# EAGLE board CPC_SIXROM_v1.00 (EAGLE 6.4)
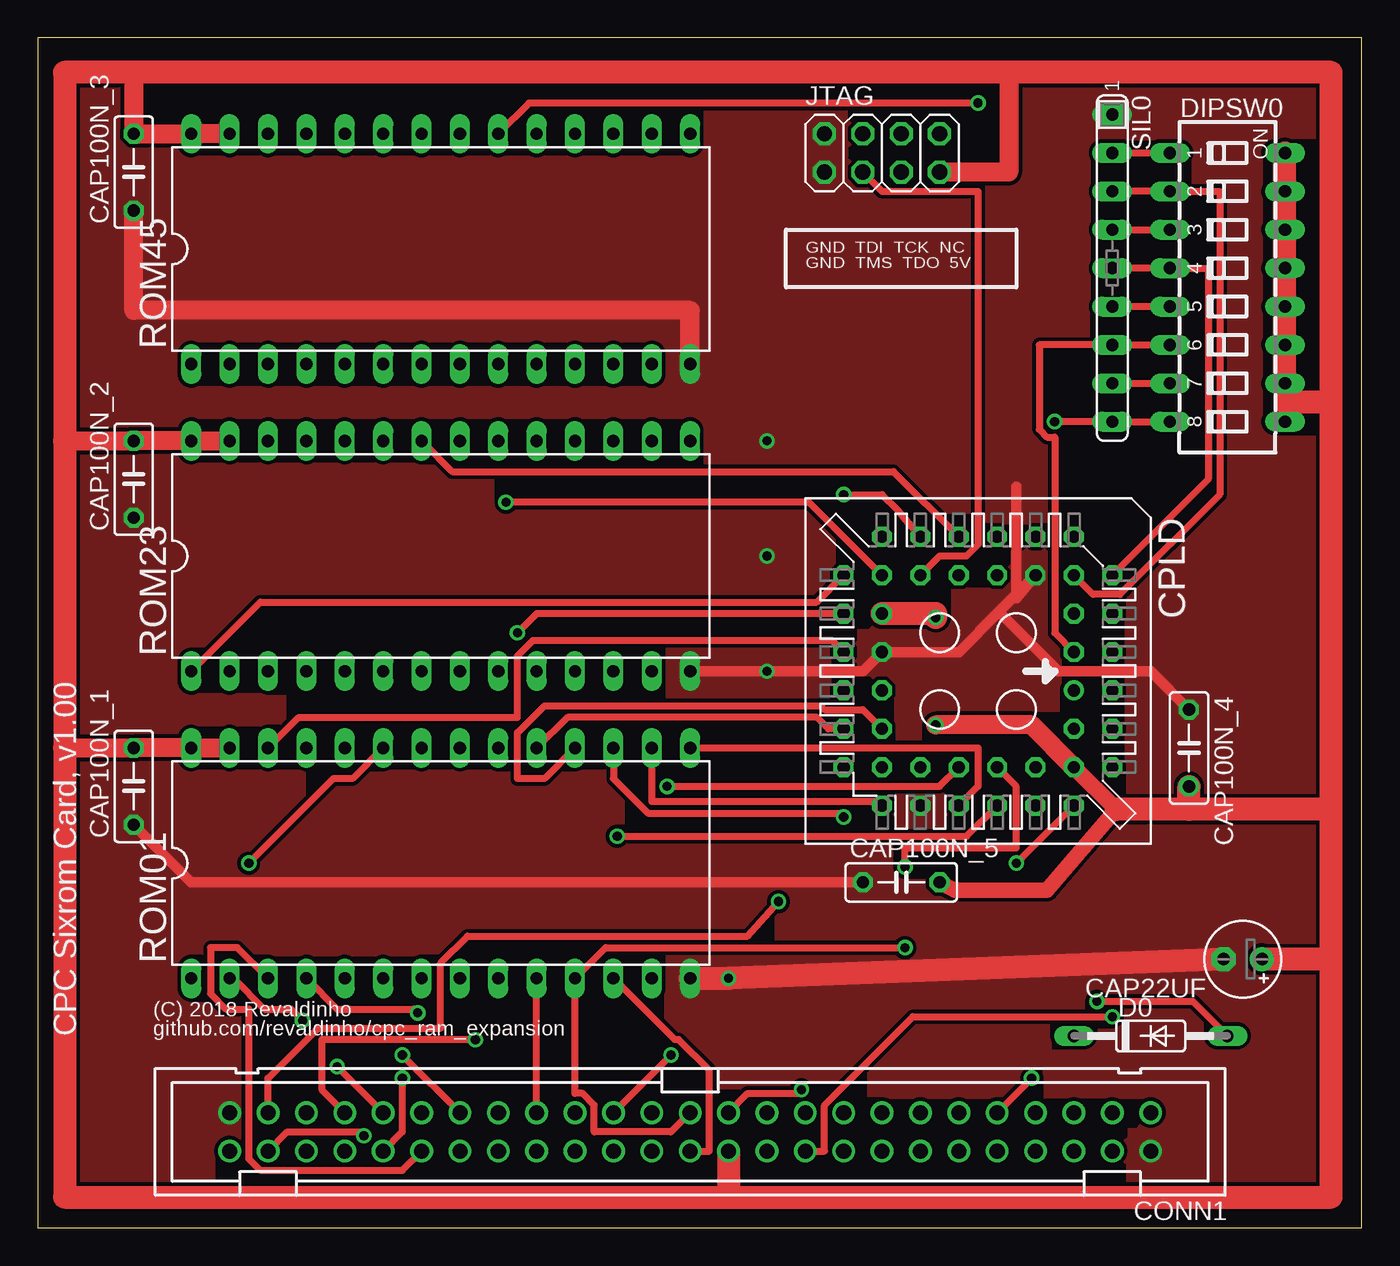
[diagram p0: board, top side]
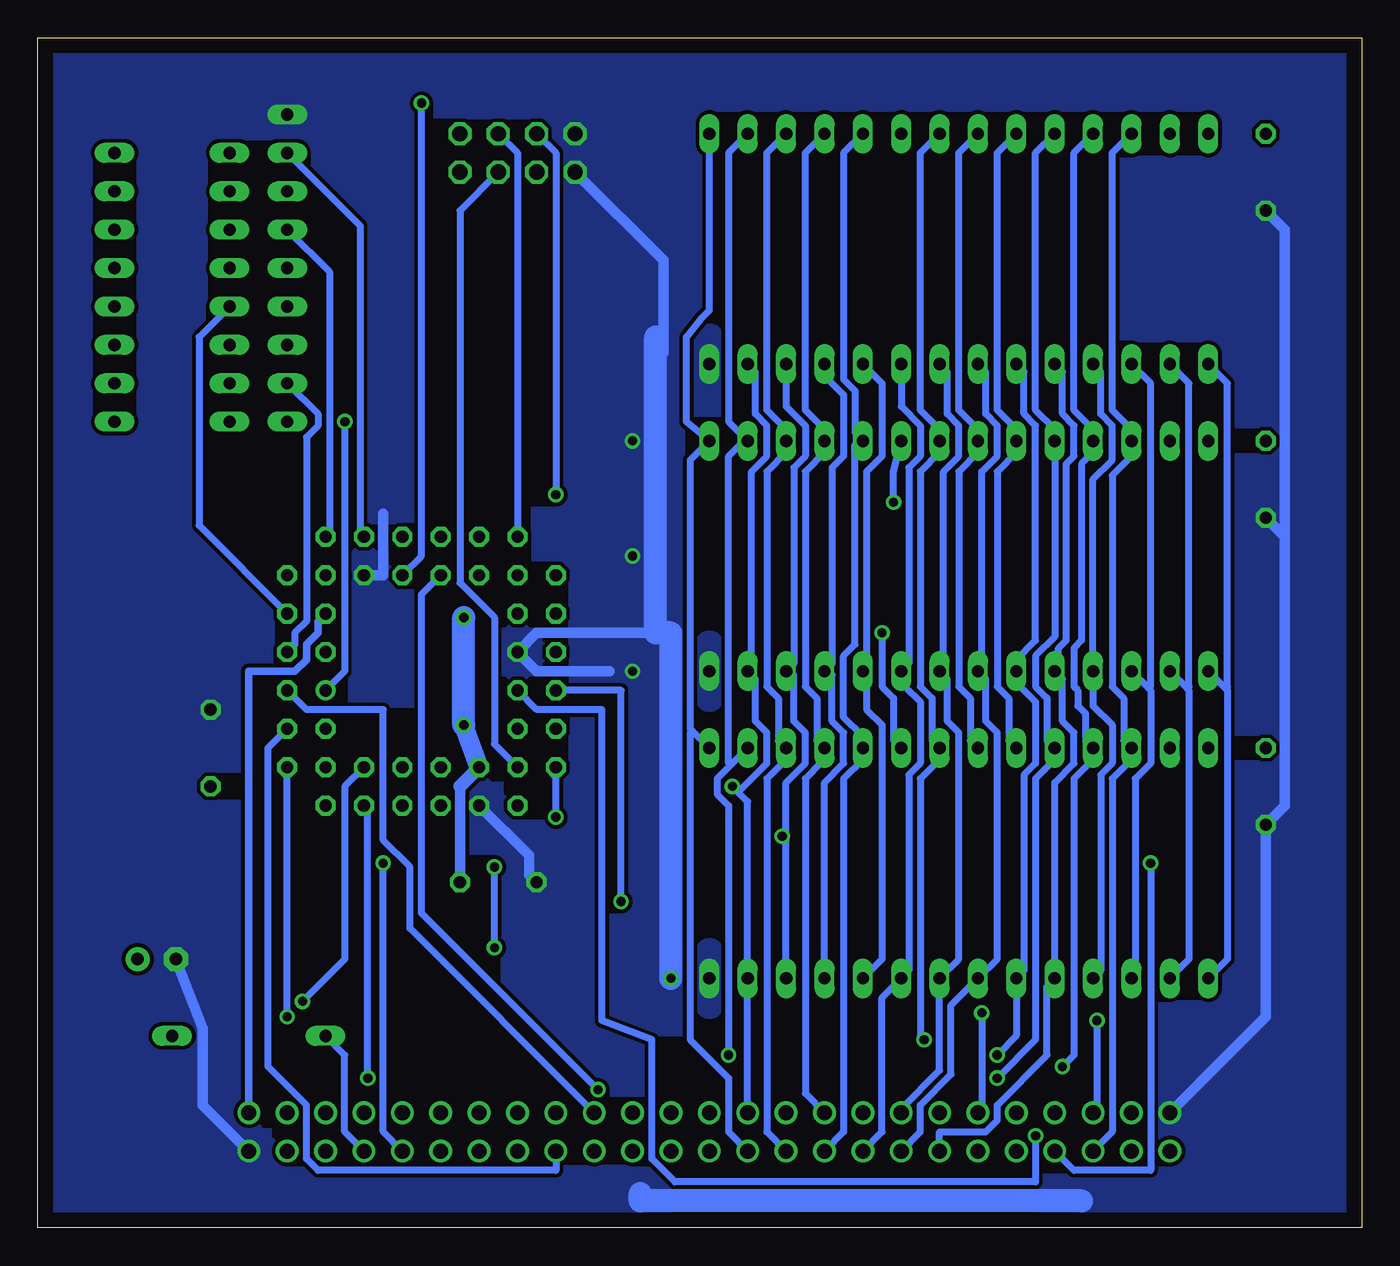
[diagram p1: board, bottom side, seen from below]

Size 87.63 x 78.74 mm. Coordinates in mm from the lower left corner, seen from the top.
Outline: 0,0 87.63,0 87.63,78.74 0,78.74 0,0
Copper layers (1*16): Top 0.035mm / dielectric 1.5mm / Bottom 0.035mm
Design rules "default": minimum track width 10mil, minimum drill 24mil, track to track 8mil, track to pad 8mil, pad to pad 8mil, via to via 8mil, smd to smd 8mil, copper to edge 40mil, drill to drill 8mil, minimum pad ring 10mil, minimum via ring 8mil, stop-mask expansion 4mil, vias tented up to drill 0mil, thermal gap 10mil
Net classes: 0 signal: width 0.457 mm, clearance 0.254 mm; 1 supply: width 0.711 mm, clearance 0.254 mm

## Footprints (pad centres in the part's own frame; a part is rotated, then mirrored left to right if it is on the bottom)
E2,5-5 = drill 0.813 pad 1.6: + -1.27,0 | drill 0.813 pad 1.6 octagon: - 1.27,0
C050-025X075 = drill 0.813 octagon: 1 -2.54,0; 2 2.54,0
PAK100/2500-50 = drill 1 pad 1.422: 1 -30.48,-1.27; 2 -30.48,1.27; 3 -27.94,-1.27; 4 -27.94,1.27; 5 -25.4,-1.27; 6 -25.4,1.27; 7 -22.86,-1.27; 8 -22.86,1.27; 9 -20.32,-1.27; 10 -20.32,1.27; 11 -17.78,-1.27; 12 -17.78,1.27; 13 -15.24,-1.27; 14 -15.24,1.27; 15 -12.7,-1.27; 16 -12.7,1.27; 17 -10.16,-1.27; 18 -10.16,1.27; 19 -7.62,-1.27; 20 -7.62,1.27; 21 -5.08,-1.27; 22 -5.08,1.27; 23 -2.54,-1.27; 24 -2.54,1.27; 25 0,-1.27; 26 0,1.27; 27 2.54,-1.27; 28 2.54,1.27; 29 5.08,-1.27; 30 5.08,1.27; 31 7.62,-1.27; 32 7.62,1.27; 33 10.16,-1.27; 34 10.16,1.27; 35 12.7,-1.27; 36 12.7,1.27; 37 15.24,-1.27; 38 15.24,1.27; 39 17.78,-1.27; 40 17.78,1.27; 41 20.32,-1.27; 42 20.32,1.27; 43 22.86,-1.27; 44 22.86,1.27; 45 25.4,-1.27; 46 25.4,1.27; 47 27.94,-1.27; 48 27.94,1.27; 49 30.48,-1.27; 50 30.48,1.27
PLCC-S44-SOCKET = drill 0.813: 1 1.27,6.35 | drill 0.813 octagon: 2 -1.27,8.89; 3 -1.27,6.35; 4 -3.81,8.89; 5 -3.81,6.35; 6 -6.35,8.89; 7 -8.89,6.35; 8 -6.35,6.35; 9 -8.89,3.81; 10 -6.35,3.81; 11 -8.89,1.27; 12 -6.35,1.27; 13 -8.89,-1.27; 14 -6.35,-1.27; 15 -8.89,-3.81; 16 -6.35,-3.81; 17 -8.89,-6.35; 18 -6.35,-8.89; 19 -6.35,-6.35; 20 -3.81,-8.89; 21 -3.81,-6.35; 22 -1.27,-8.89; 23 -1.27,-6.35; 24 1.27,-8.89; 25 1.27,-6.35; 26 3.81,-8.89; 27 3.81,-6.35; 28 6.35,-8.89; 29 8.89,-6.35; 30 6.35,-6.35; 31 8.89,-3.81; 32 6.35,-3.81; 33 8.89,-1.27; 34 6.35,-1.27; 35 8.89,1.27; 36 6.35,1.27; 37 8.89,3.81; 38 6.35,3.81; 39 8.89,6.35; 40 6.35,8.89; 41 6.35,6.35; 42 3.81,8.89; 43 3.81,6.35; 44 1.27,8.89
DO35-10 = drill 0.813 long: A 5.08,0; C -5.08,0
SD4-08 = drill 0.813 long: 1 -8.89,-3.81; 2 -6.35,-3.81; 3 -3.81,-3.81; 4 -1.27,-3.81; 5 1.27,-3.81; 6 3.81,-3.81; 7 6.35,-3.81; 8 8.89,-3.81; 9 8.89,3.81; 10 6.35,3.81; 11 3.81,3.81; 12 1.27,3.81; 13 -1.27,3.81; 14 -3.81,3.81; 15 -6.35,3.81; 16 -8.89,3.81
2X04 = drill 1.016 octagon: 1 -3.81,-1.27; 2 -3.81,1.27; 3 -1.27,-1.27; 4 -1.27,1.27; 5 1.27,-1.27; 6 1.27,1.27; 7 3.81,-1.27; 8 3.81,1.27
DIL28 = drill 0.813 long: 1 -16.51,-7.62; 2 -13.97,-7.62; 3 -11.43,-7.62; 4 -8.89,-7.62; 5 -6.35,-7.62; 6 -3.81,-7.62; 7 -1.27,-7.62; 8 1.27,-7.62; 9 3.81,-7.62; 10 6.35,-7.62; 11 8.89,-7.62; 12 11.43,-7.62; 13 13.97,-7.62; 14 16.51,-7.62; 15 16.51,7.62; 16 13.97,7.62; 17 11.43,7.62; 18 8.89,7.62; 19 6.35,7.62; 20 3.81,7.62; 21 1.27,7.62; 22 -1.27,7.62; 23 -3.81,7.62; 24 -6.35,7.62; 25 -8.89,7.62; 26 -11.43,7.62; 27 -13.97,7.62; 28 -16.51,7.62
SIL9 = drill 0.813 long: 1 -10.16,0; 2 -7.62,0; 3 -5.08,0; 4 -2.54,0; 5 0,0; 6 2.54,0; 7 5.08,0; 8 7.62,0; 9 10.16,0

## Placement (x,y rotation side)
CAP22UF  [E2,5-5]  79.76,17.78 180 top
CAP100N_1  [C050-025X075]  6.35,29.21 90 top
CAP100N_2  [C050-025X075]  6.35,49.53 90 top
CAP100N_3  [C050-025X075]  6.35,69.85 90 top
CAP100N_4  [C050-025X075]  76.2,31.75 270 top
CAP100N_5  [C050-025X075]  57.15,22.86 0 top
CONN1  [PAK100/2500-50]  43.18,6.35 180 top
CPLD  [PLCC-S44-SOCKET]  62.23,36.83 270 top
D0  [DO35-10]  73.66,12.7 0 top
DIPSW0  [SD4-08]  78.74,62.23 270 top
JTAG  [2X04]  55.88,71.12 0 top
ROM01  [DIL28]  26.67,24.13 0 top
ROM23  [DIL28]  26.67,44.45 0 top
ROM45  [DIL28]  26.67,64.77 0 top
SIL0  [SIL9]  71.12,63.5 270 top

## Library data of the parts
CAP22UF CAP100N_1-CAP100N_5 = resistor
CONN1 = con-3m
CPLD ROM01 ROM23 ROM45 = ic-package
D0 = diode
DIPSW0 = switch-dil
JTAG = pinhead
SIL0 = resistor-sil

## Nets
A0: CONN1.33 ROM01.10 ROM23.10 ROM45.10
A1: CONN1.34 ROM01.9 ROM23.9 ROM45.9
A2: CONN1.35 ROM01.8 ROM23.8 ROM45.8
A3: CONN1.36 ROM01.7 ROM23.7 ROM45.7
A4: CONN1.37 ROM01.6 ROM23.6 ROM45.6
A5: CONN1.38 ROM01.5 ROM23.5 ROM45.5
A6: CONN1.39 ROM01.4 ROM23.4 ROM45.4
A7: CONN1.40 ROM01.3 ROM23.3 ROM45.3
A8: CONN1.41 ROM01.25 ROM23.25 ROM45.25
A9: CONN1.42 ROM01.24 ROM23.24 ROM45.24
A10: CONN1.43 ROM01.21 ROM23.21 ROM45.21
A11: CONN1.44 ROM01.23 ROM23.23 ROM45.23
A12: CONN1.45 ROM01.2 ROM23.2 ROM45.2
A13: CONN1.46 CPLD.22 ROM01.26 ROM23.26 ROM45.26
A14: CONN1.47 CPLD.24
A15: CONN1.48 CPLD.25
BUSACK_B: CONN1.13
BUSRESET_B: CONN1.11
BUSRQ_B: CONN1.14
CLK: CONN1.1 CPLD.5
CURSOR: CONN1.5
D0: CONN1.25 CPLD.36 ROM01.11 ROM23.11 ROM45.11
D1: CONN1.26 CPLD.35 ROM01.12 ROM23.12 ROM45.12
D2: CONN1.27 CPLD.34 ROM01.13 ROM23.13 ROM45.13
D3: CONN1.28 CPLD.33 ROM01.15 ROM23.15 ROM45.15
D4: CONN1.29 CPLD.29 ROM01.16 ROM23.16 ROM45.16
D5: CONN1.30 CPLD.28 ROM01.17 ROM23.17 ROM45.17
D6: CONN1.31 CPLD.27 ROM01.18 ROM23.18 ROM45.18
D7: CONN1.32 CPLD.26 ROM01.19 ROM23.19 ROM45.19
DIP0: CPLD.9 DIPSW0.1 SIL0.2
DIP1: CPLD.8 DIPSW0.2 SIL0.3
DIP2: CPLD.7 DIPSW0.3 SIL0.4
DIP3: CPLD.6 DIPSW0.4 SIL0.5
DIP4: CPLD.4 DIPSW0.5 SIL0.6
DIP5: CPLD.3 DIPSW0.6 SIL0.7
DIP6: CPLD.2 DIPSW0.7 SIL0.8
DIP7: CPLD.1 DIPSW0.8 SIL0.9
EXP_B: CONN1.3
HALT_B: CONN1.17
INT_B: CONN1.16
IOREQ_B: CONN1.20 CPLD.40
LPEN: CONN1.4
M1_B: CONN1.22
MREQ_B: CONN1.23 CPLD.14
NMI_B: CONN1.15
RAMDIS: CONN1.6
RAMRD_B: CONN1.7
RD_B: CONN1.19 CPLD.44
READY: CONN1.12
RESET_B: CONN1.10 CPLD.39
RFSH_B: CONN1.21
ROM01CS_B: CPLD.20 ROM01.20
ROM23CS_B: CPLD.19 ROM23.20
ROM45CS_B: CPLD.12 ROM45.20
ROMA14: CPLD.18 ROM01.1 ROM23.1 ROM45.1
ROMDIS: CONN1.8 D0.C
ROMDIS_PRE: CPLD.38 D0.A
ROMEN_B: CONN1.9 CPLD.37
ROMOE_B: CPLD.13 ROM01.22 ROM23.22 ROM45.22
SOUND: CONN1.50
TCK: CPLD.17 JTAG.6
TDI: CPLD.15 JTAG.4
TDO: CPLD.30 JTAG.5
TMS: CPLD.16 JTAG.3
VDD [supply]: CAP22UF.+ CAP100N_1.2 CAP100N_2.2 CAP100N_3.2 CAP100N_4.2 CAP100N_5.2 CONN1.24 CPLD.21 CPLD.32 CPLD.41 DIPSW0.9 DIPSW0.10 DIPSW0.11 DIPSW0.12 DIPSW0.13 DIPSW0.14 DIPSW0.15 DIPSW0.16 JTAG.7 ROM01.27 ROM01.28 ROM23.27 ROM23.28 ROM45.27 ROM45.28
VSS [supply]: CAP22UF.- CAP100N_1.1 CAP100N_2.1 CAP100N_3.1 CAP100N_4.1 CAP100N_5.1 CONN1.2 CONN1.49 CPLD.10 CPLD.23 CPLD.31 JTAG.1 JTAG.2 ROM01.14 ROM23.14 ROM45.14 SIL0.1
WR_B: CONN1.18 CPLD.42

## Tracks (layer width: path | path; a pad name or v marks a point on that pad's centre or on a via)
A0
  Top 0.457: CONN1.33 ROM01.10
  Bottom 0.457: ROM45.10 31.75,55.88 31.75,51.05 32.77,50.04 32.77,37.08 ROM23.10 32.77,36.83 32.77,34.29 31.75,33.27 31.75,17.78 ROM01.10
A1
  Bottom 0.457: CONN1.34 31.75,6.35 31.75,15.24 ROM01.9 29.97,17.02 29.97,29.97 29.21,30.73 29.21,34.8 30.23,35.81 30.23,36.83 ROM23.9 29.97,37.34 29.97,50.29 29.21,51.05 29.21,53.09 30.48,54.36 ROM45.9
A2
  Bottom 0.457: CONN1.35 30.48,7.87 27.94,10.41 ROM01.8 26.67,17.78 26.67,32.77 27.43,33.53 27.43,36.32 ROM23.8 27.69,36.83 27.69,50.04 26.67,51.05 26.67,53.09 27.43,53.85 27.43,56.64 ROM45.8
A3
  Bottom 0.457: CONN1.36 29.21,6.35 29.21,8.13 27.18,10.16 27.18,14.73 ROM01.7 24.13,17.78 24.13,32.77 24.89,33.53 24.89,36.32 ROM23.7 25.15,36.83 25.15,50.04 24.13,51.05 24.13,53.09 24.89,53.85 24.89,56.64 ROM45.7
A4  (via drill 0.61)
  Top 0.457: v24.13,11.43 CONN1.37
  Bottom 0.457: ROM45.6 22.35,56.64 22.35,53.85 21.59,53.09 21.59,38.86 22.86,37.59 ROM23.6 22.86,36.07 21.59,34.8 21.59,30.73 22.35,29.97 22.35,17.02 ROM01.6 22.86,12.7 v24.13,11.43
A5
  Bottom 0.457: CONN1.38 27.94,6.35 24.89,6.35 24.13,7.11 24.13,8.13 20.83,11.43 20.83,16 ROM01.5 20.32,29.46 19.05,30.73 19.05,32.77 19.81,33.53 19.81,36.32 ROM23.5 20.07,36.83 20.07,38.35 19.56,38.86 19.56,50.55 19.05,51.05 19.05,53.09 19.81,53.85 19.81,56.64 ROM45.5
A6  (via drill 0.61)
  Top 0.457: v25.15,14.22 24.89,14.48 19.81,14.48 ROM01.4
  Bottom 0.457: ROM01.4 17.27,17.02 17.27,29.97 16.51,30.73 16.51,33.27 17.78,34.54 ROM23.4 17.78,49.53 16.51,50.8 16.51,53.09 17.27,53.85 17.27,56.64 ROM45.4 | CONN1.39 25.15,7.87 v25.15,14.22
A7
  Top 0.457: CONN1.40 24.13,3.81 14.73,3.81 13.97,4.57 13.97,14.48 12.45,14.48 11.43,15.49 11.43,18.54 13.21,18.54 ROM01.3
  Bottom 0.457: ROM01.3 14.99,16.76 14.99,29.72 13.97,30.73 13.97,35.56 14.1,35.69 | ROM23.3 14.1,35.69 | ROM45.3 13.97,55.88 13.97,35.81 14.1,35.69
A8  (via drill 0.61)
  Top 0.457: v19.81,10.67 CONN1.41
  Bottom 0.457: ROM45.25 19.05,71.12 19.05,54.1 17.78,52.83 ROM23.25 17.78,51.31 18.54,50.55 18.54,38.86 19.05,38.35 19.05,35.81 18.8,35.56 18.8,34.54 18.29,34.04 18.29,32.26 ROM01.25 18.03,31.75 18.03,30.73 19.05,29.72 19.05,11.43 v19.81,10.67
A9  (via drill 0.61)
  Top 0.457: CONN1.42 24.13,6.35 v24.13,9.91
  Bottom 0.457: ROM45.24 21.59,71.12 21.59,54.1 20.32,52.83 ROM23.24 20.32,39.12 21.59,37.85 21.59,35.81 20.83,35.05 20.83,32.26 ROM01.24 20.57,31.75 20.57,30.73 21.59,29.72 21.59,12.45 v24.13,9.91
A10  (via drill 0.61)
  Top 0.457: CONN1.43 18.8,9.14 18.8,12.45 v28.96,12.45
  Bottom 0.457: ROM45.21 29.21,71.12 29.21,54.1 27.94,52.83 ROM23.21 27.94,51.31 29.21,50.04 29.21,35.81 28.45,35.05 28.45,32.26 ROM01.21 28.19,31.75 28.19,30.73 29.21,29.72 29.21,12.7 v28.96,12.45
A11  (via drill 0.61)
  Top 0.457: v13.97,24.13 19.56,29.72 20.83,29.72 ROM01.23
  Bottom 0.457: ROM01.23 23.37,32.26 23.37,35.05 24.13,35.81 24.13,50.04 22.86,51.31 ROM23.23 22.86,52.83 24.13,54.1 24.13,71.12 ROM45.23 | CONN1.44 19.05,3.81 13.97,3.81 v13.97,24.13
A12  (via drill 0.61)
  Top 0.457: v17.53,13.72 16.76,14.48 14.99,14.48 12.95,16.51 ROM01.2
  Bottom 0.457: ROM01.2 11.43,17.78 11.43,35.56 11.56,35.69 | ROM23.2 11.56,35.69 | ROM45.2 11.43,55.88 11.43,35.81 11.56,35.69 | CONN1.45 17.53,7.87 v17.53,13.72
A13
  Top 0.457: CPLD.22 52.58,38.86 32.77,38.86 31.75,37.85 31.75,33.78 17.27,33.78 ROM01.26
  Bottom 0.457: ROM45.26 16.51,71.12 16.51,54.1 15.24,52.83 ROM23.26 15.24,51.05 16.51,49.78 16.51,35.81 15.75,35.05 15.75,32.26 ROM01.26 15.49,31.75 15.49,30.73 16.51,29.72 16.51,6.35 CONN1.46
A14  (via drill 0.61)
  Top 0.457: v49.02,21.59 46.99,19.3 28.45,19.3 26.67,17.53 26.67,13.21 18.54,13.21 15.24,9.91 CONN1.47
  Bottom 0.457: CPLD.24 49.02,35.56 v49.02,21.59
A15  (via drill 0.61)
  Top 0.457: v21.59,6.1 21.34,6.35 16.51,6.35 CONN1.48
  Bottom 0.457: CPLD.25 54.61,34.29 50.29,34.29 50.29,13.72 46.99,12.45 46.99,4.57 45.47,3.05 21.59,3.05 v21.59,6.1
CLK
  Bottom 0.508: CPLD.5 69.09,40.13 69.09,39.37 69.85,38.61 69.85,37.59 70.61,36.83 73.66,36.83 CONN1.1
D0  (via drill 0.61)
  Top 0.457: CONN1.25 41.91,6.35 36.83,6.35 36.83,8.13 36.07,8.89 35.56,8.89 ROM01.11 37.59,18.54 v57.4,18.54 | CPLD.36 64.77,29.21 64.77,25.15 57.4,25.15 v57.4,23.88
  Bottom 0.457: ROM45.11 35.56,56.39 34.29,55.12 34.29,51.05 35.05,50.29 35.05,37.34 ROM23.11 35.31,36.83 35.05,36.58 35.05,33.53 34.29,32.77 34.29,30.73 35.56,29.46 ROM01.11 | v57.4,18.54 v57.4,23.88
D1  (via drill 0.61)
  Top 0.457: ROM01.12 42.16,12.45 42.42,12.45 44.45,10.41 44.45,5.08 CONN1.26 | CPLD.35 61.47,25.91 v38.35,25.91
  Bottom 0.457: ROM45.12 38.1,54.36 36.83,53.09 36.83,51.05 37.59,50.29 37.59,37.34 ROM23.12 37.85,36.83 37.59,36.58 37.59,33.53 36.83,32.77 36.83,30.73 38.1,29.46 38.1,25.91 v38.35,25.91 38.1,25.65 ROM01.12
D2  (via drill 0.61)
  Top 0.457: CPLD.34 59.69,29.21 v41.66,29.21
  Bottom 0.457: CONN1.27 ROM01.13 40.64,28.19 41.27,28.83 | 41.27,28.83 v41.66,29.21 | 41.27,28.83 39.37,30.73 39.37,32.77 40.13,33.53 40.13,36.32 ROM23.13 40.39,36.83 40.39,50.04 39.37,51.05 39.37,53.09 40.13,53.85 40.13,56.64 ROM45.13
D3
  Top 0.457: CPLD.33 62.23,29.21 62.23,31.75 ROM01.15
  Bottom 0.457: 44.32,32.89 44.45,33.02 44.45,50.8 ROM23.15 44.7,53.34 44.7,58.93 43.69,60.2 43.18,60.71 ROM45.15 | 44.32,32.89 ROM01.15 | CONN1.28 41.91,6.35 41.91,9.91 44.45,12.45 44.45,32.77 44.32,32.89
D4  (via drill 0.61)
  Top 0.457: ROM01.16 40.64,28.19 55.63,28.19 CPLD.29 | v41.91,11.43 CONN1.29
  Bottom 0.457: ROM45.16 41.91,71.12 41.91,53.34 ROM23.16 40.89,52.07 41.91,51.05 41.91,30.73 41.78,30.61 | v41.91,11.43 41.91,27.94 42.67,28.7 42.67,29.72 41.78,30.61 | ROM01.16 41.78,30.61
D5  (via drill 0.61)
  Top 0.457: v53.34,27.18 53.34,27.43 40.39,27.43 38.1,29.72 ROM01.17
  Bottom 0.457: ROM45.17 39.37,71.12 39.37,54.1 38.1,52.83 ROM23.17 38.1,51.31 39.37,50.04 39.37,35.81 38.61,35.05 38.61,32.26 ROM01.17 38.35,31.75 38.35,30.73 39.37,29.72 39.37,6.35 CONN1.30 | v53.34,27.18 CPLD.28
D6
  Top 0.457: CPLD.27 54.61,34.29 52.07,34.29 51.82,34.54 33.53,34.54 31.75,32.77 31.75,29.72 33.53,29.72 ROM01.18
  Bottom 0.457: ROM45.18 36.83,71.12 36.83,54.1 35.56,52.83 ROM23.18 35.56,51.31 36.83,50.04 36.83,35.81 36.07,35.05 36.07,32.26 ROM01.18 35.81,31.75 35.81,30.73 36.83,29.72 36.83,8.89 CONN1.31
D7
  Top 0.457: ROM01.19 35.05,33.78 51.56,33.78 52.32,33.02 CPLD.26
  Bottom 0.457: ROM45.19 34.29,71.12 34.29,56.13 33.53,55.37 33.53,52.58 ROM23.19 33.27,52.07 33.53,51.82 33.53,38.61 34.29,37.85 34.29,33.78 33.02,32.51 ROM01.19 33.02,30.99 34.29,29.72 34.29,6.35 CONN1.32
DIP0
  Top 0.457: SIL0.2 DIPSW0.1
  Bottom 0.457: CPLD.9 66.29,45.97 66.29,66.29 SIL0.2
DIP1
  Top 0.457: CPLD.8 69.85,41.91 71.63,41.91 78.23,48.51 78.23,68.58 DIPSW0.2 SIL0.3
DIP2
  Top 0.457: SIL0.4 DIPSW0.3
  Bottom 0.457: CPLD.7 68.33,45.97 68.33,63.25 SIL0.4
DIP3
  Top 0.457: CPLD.6 77.47,49.53 77.47,63.5 DIPSW0.4 SIL0.5
DIP4
  Top 0.457: DIPSW0.5 SIL0.6
  Bottom 0.457: CPLD.4 76.96,46.48 76.96,58.93 DIPSW0.5
DIP5
  Top 0.457: CPLD.3 67.31,39.37 67.31,52.32 66.8,52.32 66.29,52.83 66.29,58.42 SIL0.7 DIPSW0.6
DIP6
  Top 0.457: SIL0.8 DIPSW0.7
  Bottom 0.457: CPLD.2 70.61,38.61 70.61,39.37 69.85,40.13 69.85,52.32 69.09,53.09 69.09,53.85 SIL0.8
DIP7  (via drill 0.61)
  Top 0.457: v67.31,53.34 SIL0.9 DIPSW0.8
  Bottom 0.457: CPLD.1 67.31,36.83 v67.31,53.34
IOREQ_B  (via drill 0.61)
  Top 0.457: v71.12,13.97 57.91,13.97 52.07,8.13 52.07,5.08 CONN1.20
  Bottom 0.457: v71.12,13.97 CPLD.40
MREQ_B  (via drill 0.61)
  Top 0.457: v50.55,9.14 50.29,8.89 46.99,8.89 CONN1.23
  Bottom 0.457: CPLD.14 62.23,41.91 62.23,20.83 v50.55,9.14
RD_B
  Bottom 0.457: CPLD.44 69.85,34.29 64.77,34.29 64.77,25.65 62.99,23.88 62.99,19.81 CONN1.19
RESET_B  (via drill 0.61)
  Top 0.457: v64.77,24.13 CPLD.39
  Bottom 0.457: v64.77,24.13 64.77,6.35 CONN1.10
ROM01CS_B  (via drill 0.61)
  Top 0.457: v31.75,39.37 33.02,40.64 CPLD.20
  Bottom 0.457: ROM01.20 30.99,32.26 30.99,35.05 31.75,35.81 v31.75,39.37
ROM23CS_B  (via drill 0.61)
  Top 0.457: v30.99,48.01 51.05,48.01 CPLD.19
  Bottom 0.457: ROM23.20 30.99,50.04 v30.99,48.01
ROM45CS_B  (via drill 0.61)
  Top 0.457: ROM45.20 32.51,74.42 v62.23,74.42
  Bottom 0.457: v62.23,74.42 62.23,44.45 CPLD.12
ROMA14
  Top 0.457: CPLD.18 51.56,41.4 14.73,41.4 ROM23.1
  Bottom 0.457: ROM01.1 8.89,17.78 8.89,35.56 9.02,35.69 | ROM23.1 9.02,35.69 | ROM45.1 8.89,55.88 8.89,35.81 9.02,35.69
ROMDIS
  Bottom 0.457: D0.C 67.31,11.43 67.31,6.35 CONN1.8
ROMDIS_PRE  (via drill 0.61)
  Top 0.457: D0.A 76.45,14.99 v70.1,14.99
  Bottom 0.457: v70.1,14.99 67.31,17.78 67.31,29.21 CPLD.38
ROMEN_B  (via drill 0.61)
  Top 0.457: CONN1.9 v65.79,9.91
  Bottom 0.457: CPLD.37 65.79,27.69 v65.79,9.91
ROMOE_B
  Top 0.457: CPLD.13 56.64,50.04 27.43,50.04 ROM23.22
  Bottom 0.457: ROM01.22 25.91,32.26 25.91,35.05 26.67,35.81 26.67,50.04 25.4,51.31 ROM23.22 25.4,52.83 26.67,54.1 26.67,71.12 ROM45.22
TCK
  Bottom 0.457: CPLD.17 55.88,71.12 JTAG.6
TDI  (via drill 0.61)
  Top 0.457: v53.34,48.51 55.88,48.51 56.9,47.5 CPLD.15
  Bottom 0.457: v53.34,48.51 53.34,71.12 JTAG.4
TDO
  Bottom 0.457: CPLD.30 57.4,32 57.4,40.39 59.69,42.67 59.69,67.31 JTAG.5
TMS
  Top 0.457: CPLD.16 59.69,44.45 61.47,44.45 62.23,45.21 62.23,68.58 55.88,68.58 JTAG.3
VDD  (via drill 0.61)
  Top 0.711: 82.55,54.61 DIPSW0.9
  Top 1.016: CPLD.41 71.37,27.69 66.8,22.35 60.71,22.35 CAP100N_5.2
  Top 1.27: ROM23.27 ROM23.28 CAP100N_2.2 1.78,52.07 | ROM01.27 ROM01.28 CAP100N_1.2 1.78,31.75 | ROM45.27 ROM45.28 CAP100N_3.2 6.35,76.45 | JTAG.7 64.26,69.85 64.26,76.45 | CPLD.41 65.79,33.27 v59.44,33.27
  Top 1.524: CONN1.24 45.72,2.03 | 45.72,2.03 85.6,2.03 85.6,17.78 | 85.6,17.78 85.6,27.69 | 85.6,27.69 85.6,54.61 | 85.6,54.61 85.6,76.45 64.26,76.45 6.35,76.45 1.78,76.45 1.78,52.07 1.78,31.75 1.78,2.03 45.72,2.03 | CPLD.21 59.44,40.64 v59.44,40.39 | DIPSW0.16 DIPSW0.15 DIPSW0.14 DIPSW0.13 DIPSW0.12 DIPSW0.11 DIPSW0.10 82.55,54.61 85.6,54.61 | 85.6,27.69 76.2,27.69 | 76.2,27.69 CAP100N_4.2 | 76.2,27.69 71.37,27.69 | 85.6,17.78 CAP22UF.+
  Bottom 0.711: 59.69,29.21 CAP100N_5.2
  Bottom 0.889: CPLD.32 59.69,29.21
  Bottom 1.27: CPLD.32 v59.44,33.27
  Bottom 1.524: v59.44,33.27 v59.44,40.39
VSS  (via drill 0.61)
  Top 0.711: ROM23.14 v48.26,36.83 54.61,36.83 CPLD.23 60.96,38.1 63.63,40.77 | 63.63,40.77 CPLD.10 64.77,41.66 64.77,49.02 | CAP100N_4.1 73.66,36.83 67.56,36.83 63.63,40.77 | CAP100N_1.1 10.16,22.86 CAP100N_5.1
  Top 1.27: ROM45.14 43.18,60.71 6.35,60.71 CAP100N_3.1
  Top 1.524: CAP22UF.- v45.72,16.51 ROM01.14
  Bottom 0.711: 5.08,45.72 5.08,27.94 CAP100N_1.1 6.35,13.97 CONN1.49 | CAP100N_2.1 5.08,45.72 | CAP100N_3.1 5.08,66.04 5.08,45.72 | CPLD.31 55.12,24.64 55.12,23.37 CAP100N_5.1 | CONN1.2 76.71,8.13 76.71,13.21 CAP22UF.- | JTAG.1 46.23,64.01 46.23,57.91 46.74,58.93 | 45.72,39.37 54.61,39.37 CPLD.23 54.61,36.83 49.78,36.83 | CPLD.10 64.77,43.18 64.77,47.24
  Bottom 1.524: v45.72,16.51 45.72,39.37 46.74,39.37 46.74,58.93 | 18.54,1.78 47.75,1.78 47.75,2.29
  other vias: 48.26,44.45 48.26,52.07
  pour Top: 0,0 0,78.74 87.63,78.74 87.63,0
  pour Bottom: 0,0 0,78.74 87.63,78.74 87.63,0
WR_B
  Bottom 0.457: CPLD.42 72.39,31.75 72.39,10.67 69.85,8.13 69.85,4.57 69.09,3.81 53.34,3.81 CONN1.18

## Text on the board
tPlace: GND TDI TCK NC | GND TMS TDO 5V | (C) 2018 Revaldinho | CPC Sixrom Card, v1.00 | github.com/revaldinho/cpc_ram_expansion